# Altium PCB BugBusterMain.PcbDoc (part 2 of 6)
Units mm, origin at the board's own origin, x right, y up, seen from the top; angles counter-clockwise.
Board outline 110 x 80 mm, 6 copper layers (Top Layer, Inner Layer 1, Inner Layer 2, Inner Layer 3, Inner Layer 4, Bottom Layer), stack 1.546 mm thick; 244 components, 246 nets, 1173 pads, 1169 vias.
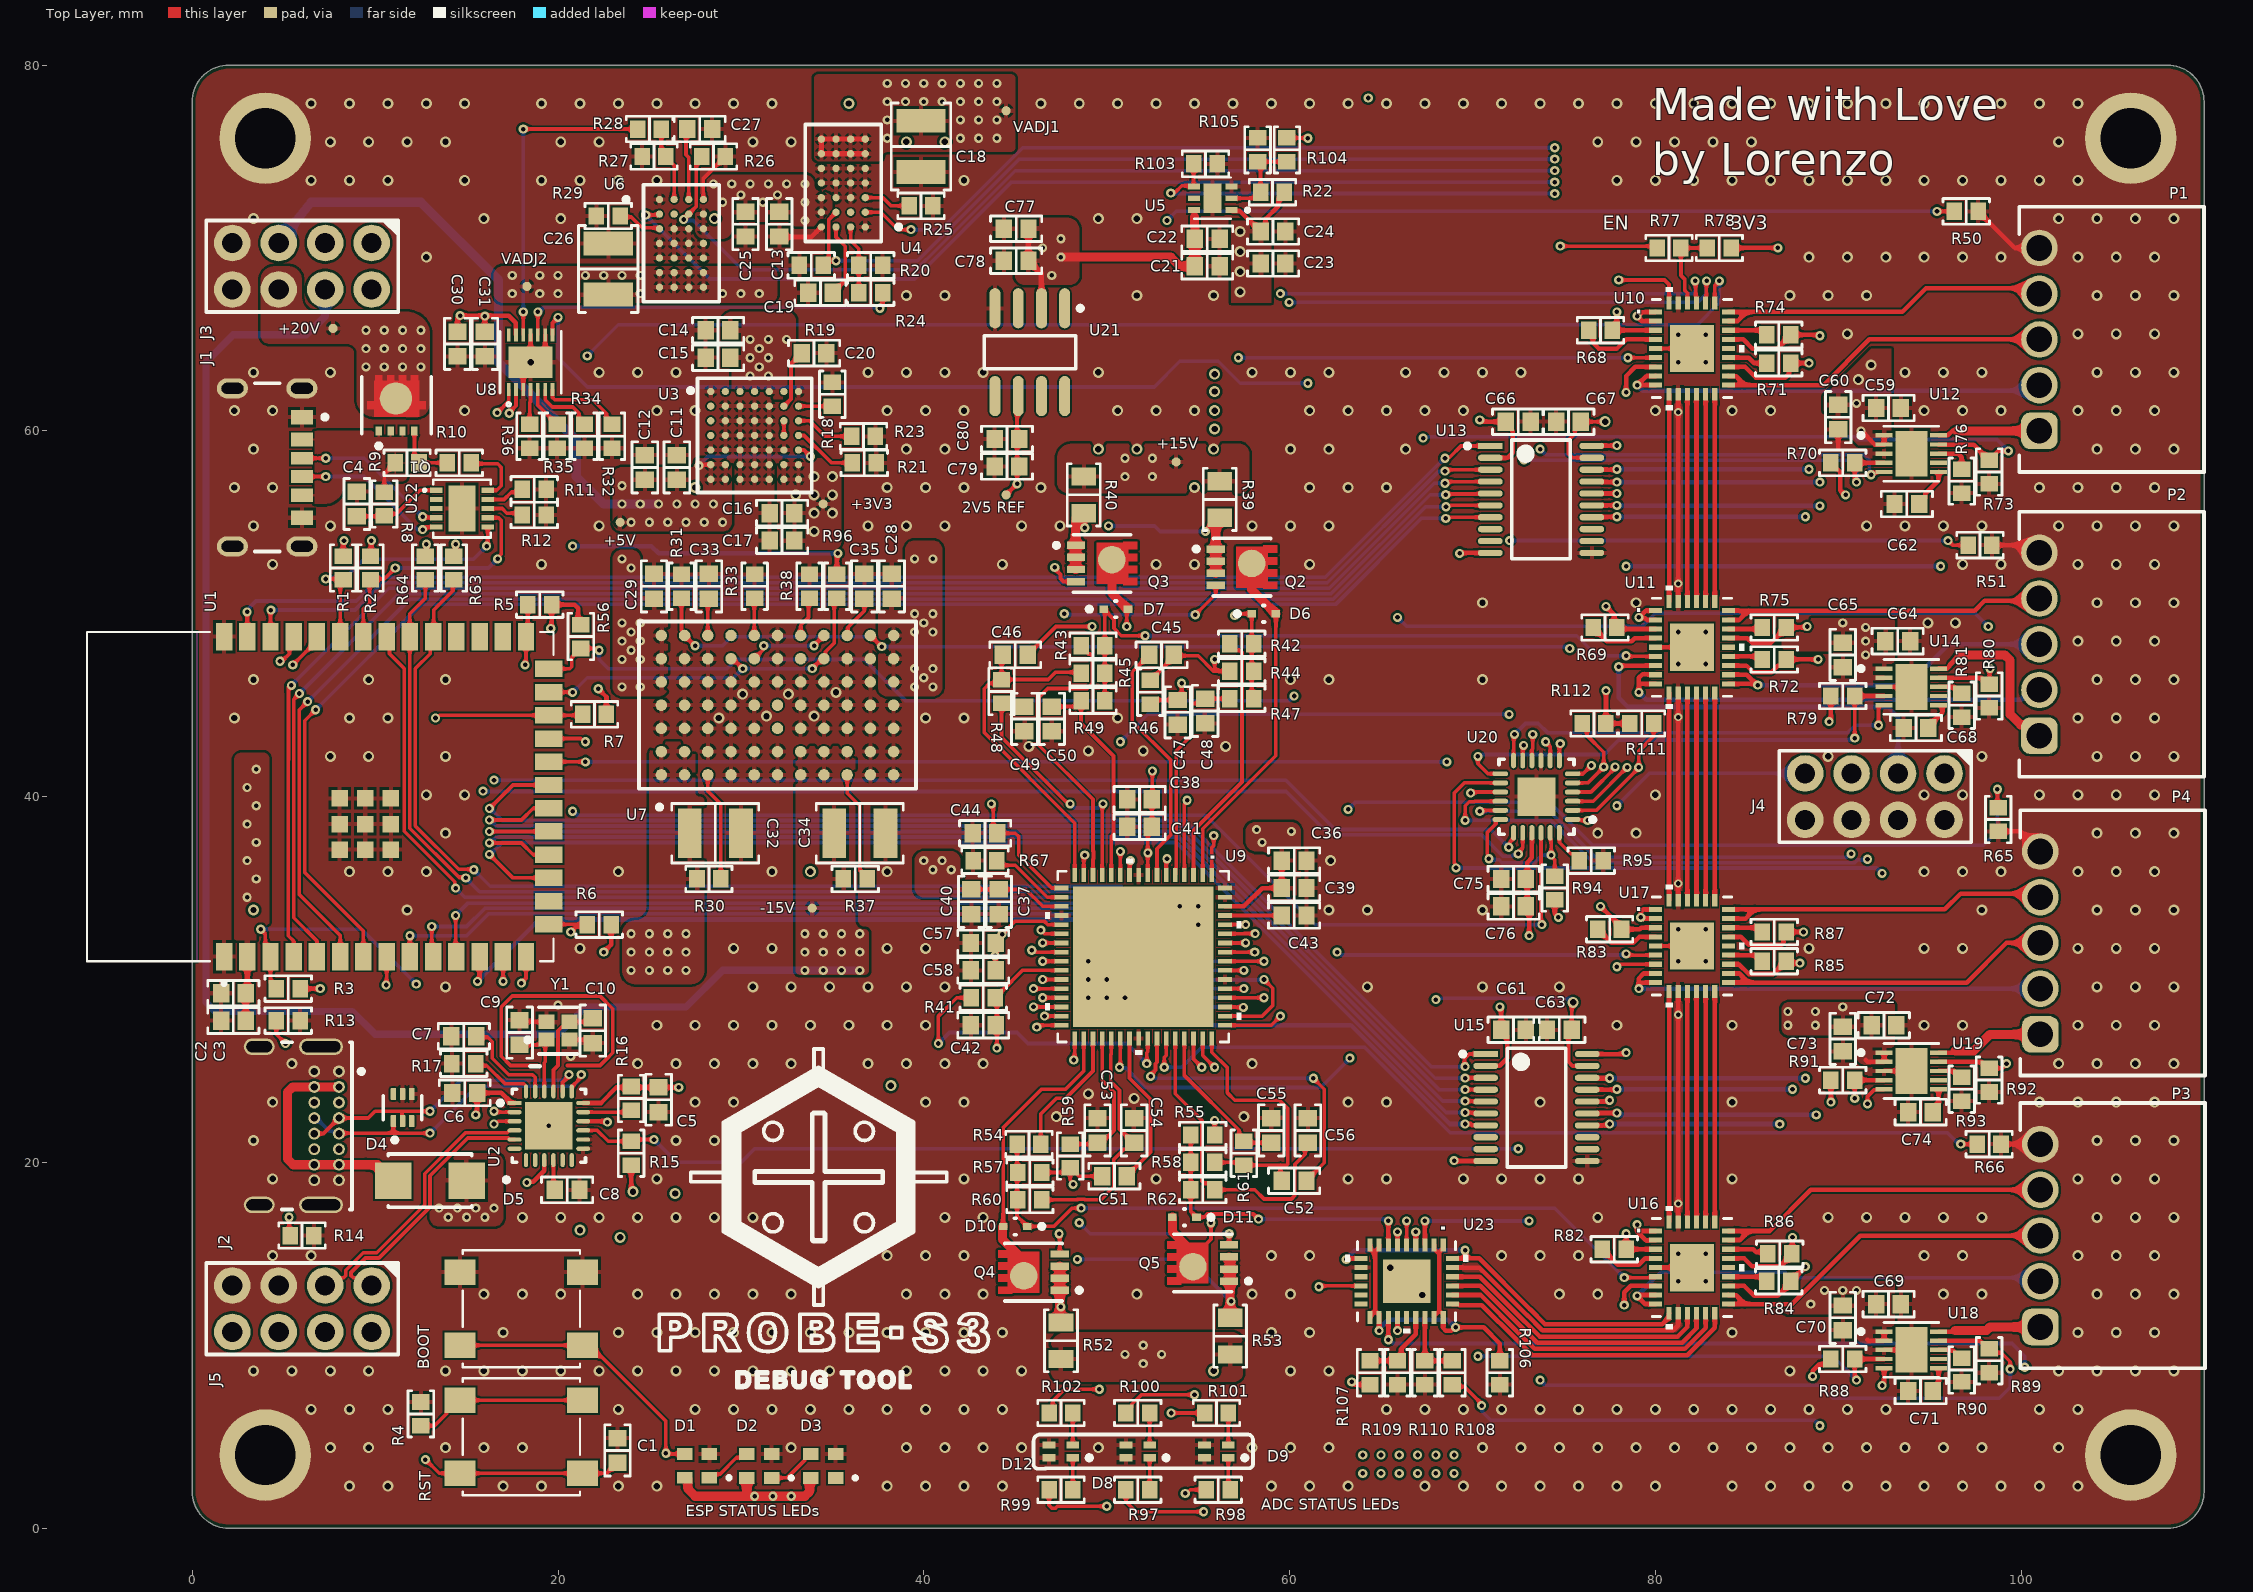
[diagram p0: Top Layer view]

## Part data (continued)
C62 C68 C71 C74: library part C0603S122K5RAC7867, "CAP CER 1200PF 50V X7R 0603", Device Package="0603 (1608 Metric)", manufacturer=KEMET, Operating Temperature="-55°C ~ 125°C", Supplier Part Number 1=399-C0603S122K5RAC7867CT-ND, Temperature Coefficient=X7R, Tolerance=±10%, Voltage - Rated=50V, Applications="General Purpose", Capacitance="1200 pF", componentlink1description=Datasheet, componentlink1url=https://api.kemet.com/component-edge/download/datasheet/C0603S122K5RACTU.pdf, componentlink2description="DigiKey Link", componentlink2url=https://www.digikey.com/en/products/detail/kemet/C0603S122K5RAC7867/2201830, Features="Floating Electrode", lastupdated="09/02/2024 20:09:56", Lifecycle Status=Active, Minimum Order=1, Mounting Type="Surface Mount, MLCC", Package / Case="0603 (1608 Metric)", packaging=TapeAndReel, Part Number=C0603S122K5RAC7867, Part Status=Active, partid=34944, price=0.05, series="SMD Comm X7R FE", Size / Dimension="0.063\" L x 0.031\" W (1.60mm x 0.80mm)", Supplier 1=DigiKey, Thickness (Max)="0.034\" (0.87mm)"
D1 D2 D3: "2020 RGB LED(BUILT-IN IC)", Package=None, Check_prices=https://www.snapeda.com/parts/XL-2020RGBC-WS2812B/Xinglight/view-part/?ref=eda, MF=XINGLIGHT, MP=XL-2020RGBC-WS2812B, SnapEDA_Link=https://www.snapeda.com/parts/XL-2020RGBC-WS2812B/Xinglight/view-part/?ref=snap